# Altium PCB Controller-Board-Rev2-Small.PcbDoc
Units mm, origin at the board's own origin, x right, y up, seen from the top; angles counter-clockwise.
Board outline 25 x 25 mm, 4 copper layers (Top Layer, Internal Plane 1, Internal Plane 2, Bottom Layer), stack 0.971 mm thick; 46 components, 54 nets, 221 pads, 87 vias.
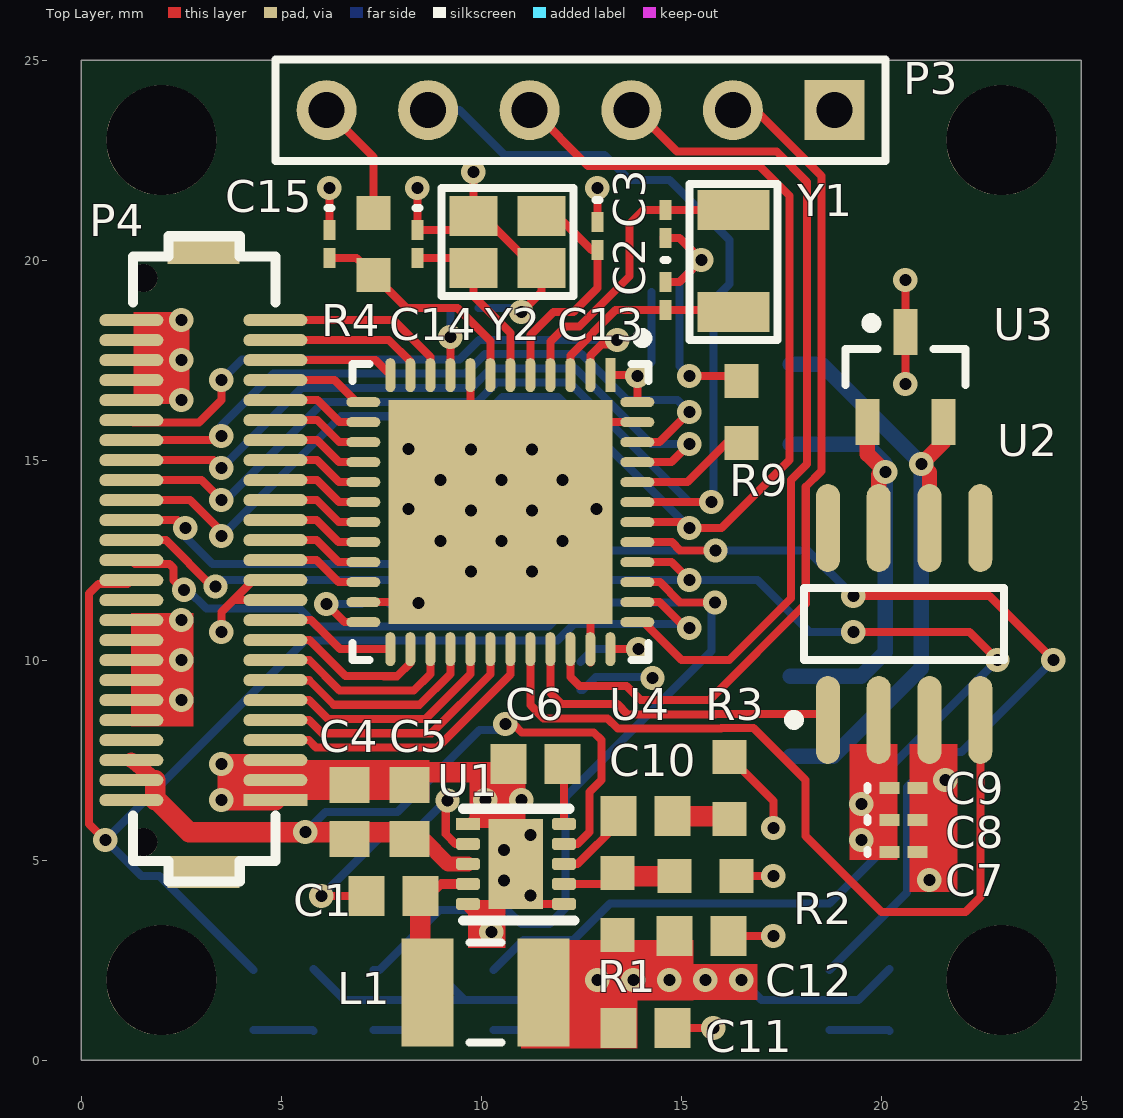
[diagram p0: Top Layer view]
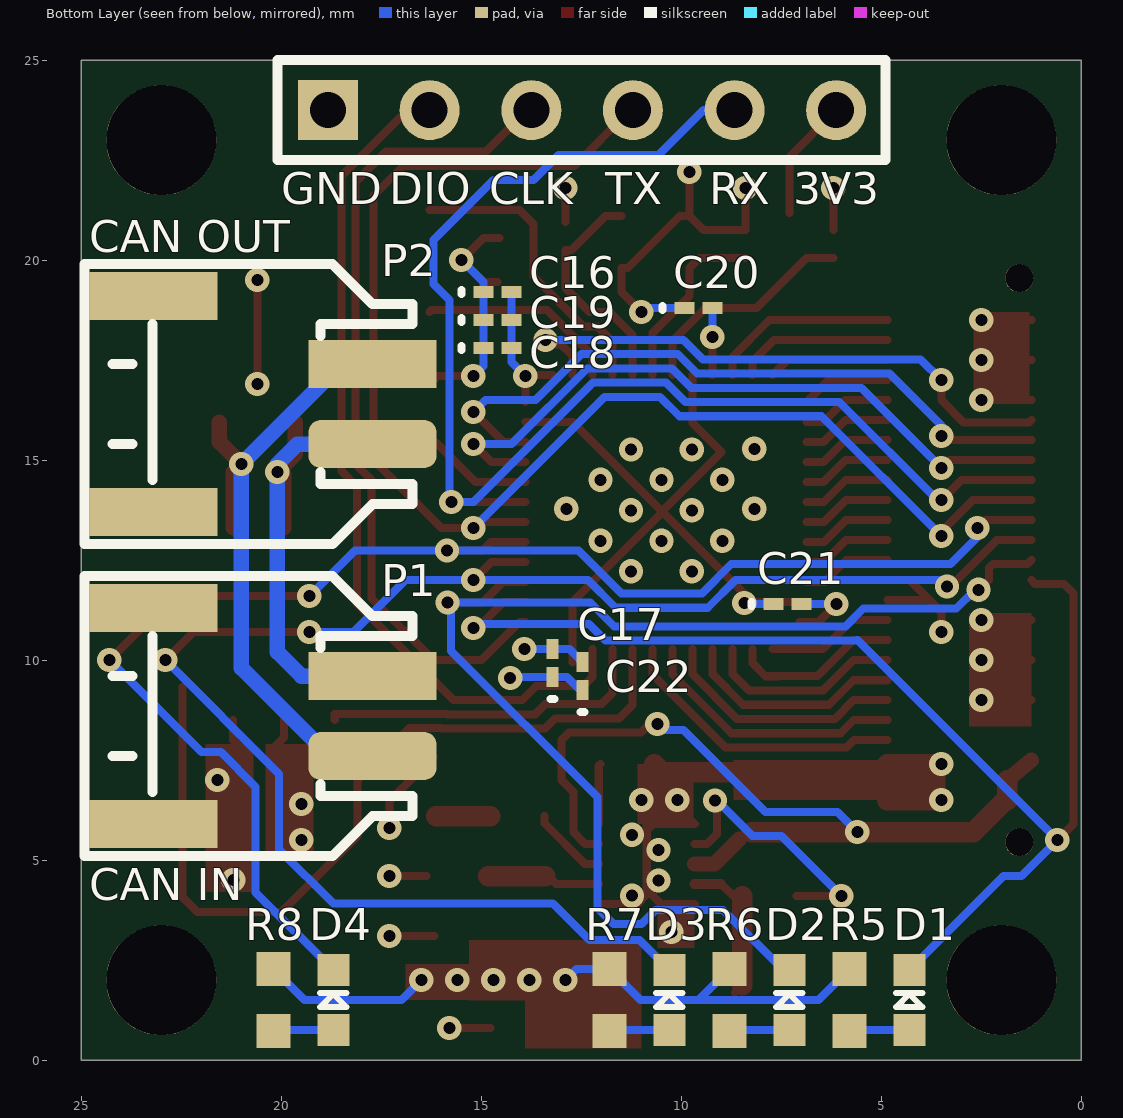
[diagram p1: Bottom Layer view, seen from below]
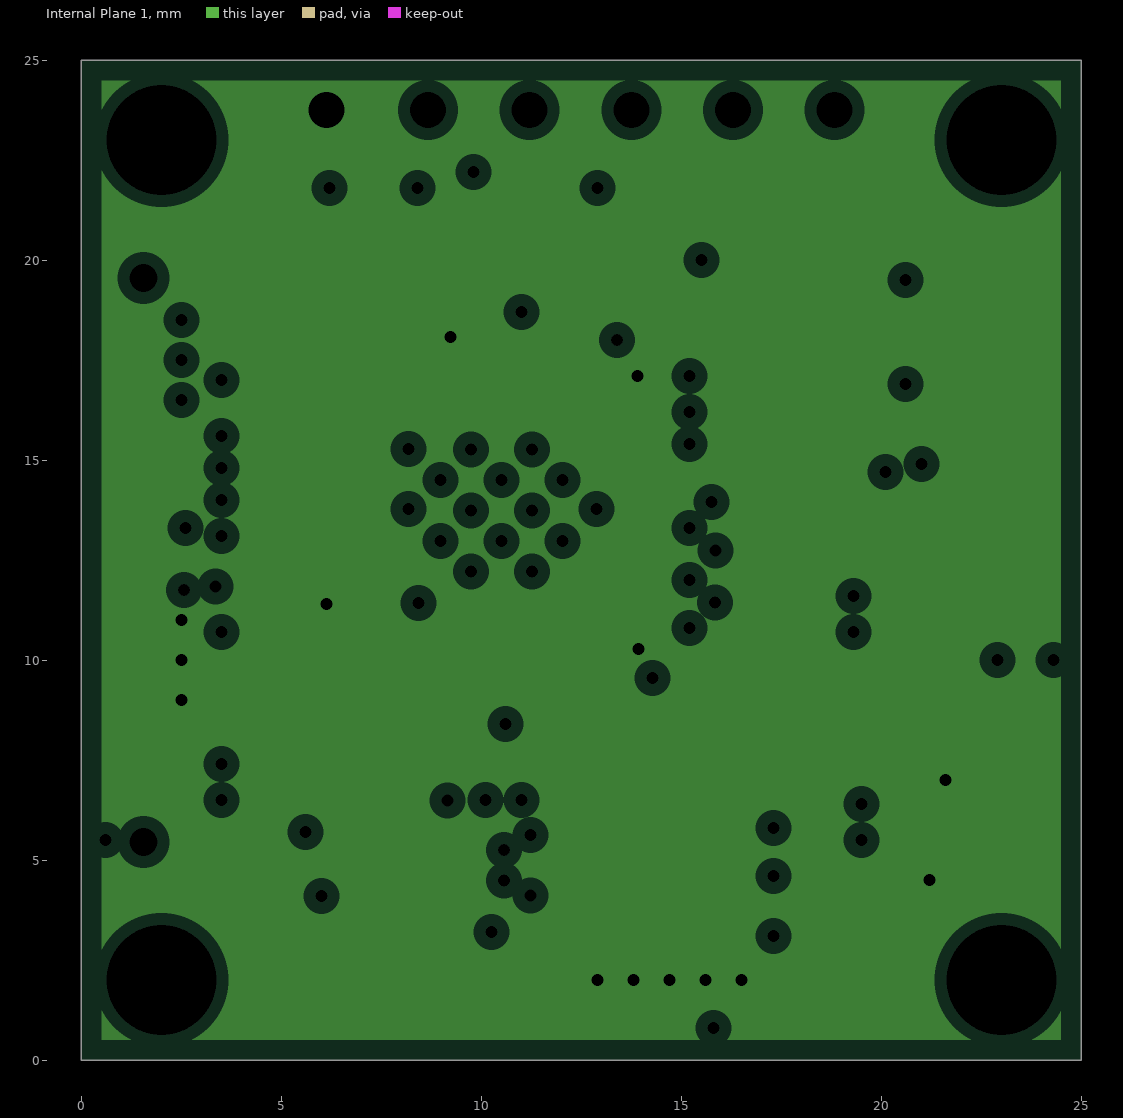
[diagram p2: Internal Plane 1, clearances drawn from the general rule]
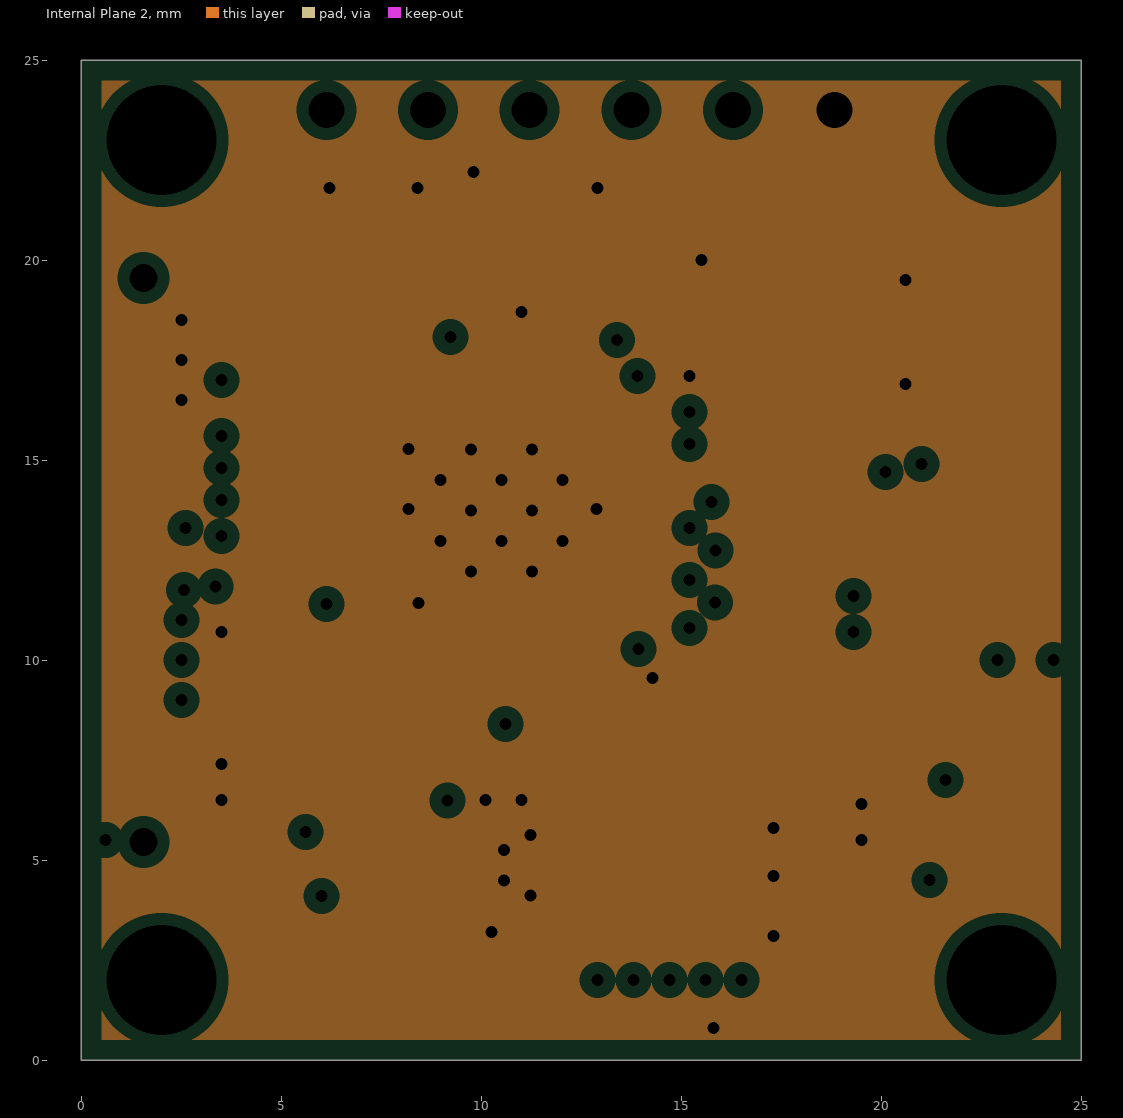
[diagram p3: Internal Plane 2, clearances drawn from the general rule]

## Layer stack, top to bottom
Top Solder: solder mask 0.0102, Solder Resist, Dk 3.5
Top Layer: signal copper 0.0356
Dielectric 3: dielectric 0.254, Dk 4.2
Internal Plane 1: plane copper 0.036, net 3V3
Dielectric 1: dielectric 0.32, FR-4, Dk 4.2
Internal Plane 2: plane copper 0.036, net GND
Dielectric 2: dielectric 0.254, Dk 4.2
Bottom Layer: signal copper 0.0356
Bottom Solder: solder mask 0.0102, Solder Resist, Dk 3.5

## Board outline
0,25 25,25 25,0 0,0

## Design rules (kind name [scope] priority, off if disabled: settings)
Clearance [All] p1: gap=0.152
DiffPairsRouting [All] p1: maxlimit=0.254 minlimit=0.254 mostfreqgap=0.254 toplayer_minwidth=0.381 toplayer_maxwidth=0.381 toplayer_prefwidth=0.381 bottomlayer_minwidth=0.381 bottomlayer_maxwidth=0.381 bottomlayer_prefwidth=0.381 maxuncoupledlength=12.7
PlaneClearance [All] p1: clearance=0.3
PlaneConnect [All] p1: planeconnectstyle=Direct reliefexpansion=0 reliefentries=4 reliefconductorwidth=0.254 reliefairgap=0.254
PolygonConnect PolygonConnect_GND_Via [IsVia vs InNet('GND')] p1: connectstyle=Direct reliefconductorwidth=0.254 reliefentries=4 polygonreliefangle="90 Angle" airgapwidth=0.254
PolygonConnect PolygonConnect_3V3_Via [IsVia vs InNet('3V3')] p2: connectstyle=Direct reliefconductorwidth=0.254 reliefentries=4 polygonreliefangle="90 Angle" airgapwidth=0.254
PolygonConnect [All] p3: connectstyle=Relief reliefconductorwidth=0.254 reliefentries=4 polygonreliefangle="90 Angle" airgapwidth=0.254
RoutingVias [All] p1: holewidth=0.3 width=0.605 viastyle="Through Hole" minholewidth=0.3 minwidth=0.605 maxholewidth=6.3 maxwidth=6.605
SolderMaskExpansion [All] p1: expansion=0.102
Width [All] p1: maxlimit=1.27 minlimit=0.152 preferedwidth=0.203
27 further rules are at their usual default settings.

## Classes and differential pairs
differential pair CAN: +CAN_P -CAN_N

## Components (designator, comment, footprint, x,y, rotation, side; value= is the part's Value field where it differs from the comment)
C1 "10nF" CAPC1608X06N 7.8,4.1 r0 top locked
C2 "8pF" 0603 14.6,19.1 r270 top
C3 "8pF" 0603 14.6,20.9 r90 top
C4 "10uF" CAPC1608X06N 6.7,6.2 r270 top locked
C5 "0.1uF" CAPC1608X06N 8.2,6.2 r270 top locked
C6 "0.1uF" CAPC1608X06N 11.35,7.4 r180 top locked
C7 "10uF" 0603 20.55,5.2 r0 top
C8 "4.7uF" 0603 20.55,6 r0 top
C9 "0.1uF" 0603 20.55,6.8 r0 top
C10 "6800pF" CAPC1608X06N 14.1,6.1 r180 top locked
C11 "22uF" CAPC1608X06N 14.1,0.8 r180 top locked
C12 "22uF" CAPC1608X06N 15.5,3.1 r180 top locked
C13 "8pF" 0603 12.9,20.6 r270 top
C14 "8pF" 0603 8.4,20.4 r270 top
C15 "0.1uF" 0603 6.2,20.4 r270 top
C16 "4.7uF" 0603 14.6,19.2 r180 bottom
C17 "4.7uF" 0603 13.225,9.925 r90 bottom
C18 "0.1uF" 0603 14.6,17.8 r180 bottom
C19 "0.1uF" 0603 14.6,18.5 r180 bottom
C20 "0.1uF" 0603 9.575,18.8 r180 bottom
C21 "0.1uF" 0603 7.35,11.4 r180 bottom
C22 "0.1uF" 0603 12.475,9.6 r90 bottom
D1 "Blue" DIOC1608X06N 4.3,1.5 r90 bottom
D2 "Blue" DIOC1608X06N 7.3,1.5 r90 bottom
D3 "Green" DIOC1608X06N 10.3,1.5 r90 bottom
D4 "Red" DIOC1608X06N 18.7,1.5 r90 bottom
L1 "10µH" 1210 10.1,1.7 r0 top locked
P1 "CAN IN" "2 POS Dura-Click" 17.72,9.6 r270 bottom locked
P2 "CAN OUT" "2 POS Dura-Click" 17.72,17.4 r270 bottom locked
P3 "Debug_Header" HDR1X6 18.83,23.75 r180 top
P4 "BergStak Receptacle" 609-5227-1-ND 3.05,12 r180 top
R1 "26.1K" RESC1608X06N 13.4,3.9 r270 top locked
R2 "10K" RESC1608X06N 15.6,4.6 r180 top locked
R3 "6.8k" RESC1608X06N 16.2,6.8 r270 top locked
R4 "100K" RESC1608X06N 7.3,20.4 r90 top
R5 "40.2R" RESC1608X06N 5.8,1.5 r90 bottom
R6 "40.2R" RESC1608X06N 8.8,1.5 r90 bottom
R7 "86.6R" RESC1608X06N 11.8,1.5 r90 bottom
R8 "86.6R" RESC1608X06N 20.2,1.5 r90 bottom
R9 "510R" RESC1608X06N 16.5,16.2 r270 top
U1 "AP65200FK-7 Buck Switching Regulator" 10-UFDFN 10.3,4 r270 top locked
U2 "TCAN332DR CAN Transceiver" SOIC8 20.6,10.9 r90 top
U3 "TVS Diode" SOT23 20.6,17.075 r90 top
U4 "STM32F072CBT6" QFN50P700X700X60_HS-49N 10.475,13.7 r270 top
Y1 "32.768 kHz" "ABS07AIG CRYSTAL" 16.3,18.7 r90 top
Y2 "32 MHz" "CX2520DB CRYSTAL" 11.5,21.1 r180 top

## Footprints (in the part's own frame and the unit in brackets; to place one, negate y for a bottom-side part, rotate by r counter-clockwise, add the part's x,y. Pads: shape width x height; smd on the part's side, far side on the other; paste and mask are expansions set on the pad)
"2 POS Dura-Click" [mm] "WM7169CT-ND"
  rect 1.2x3.2 smd: 1(0,0) ""(-1.7,-5.48) ""(3.7,-5.48)
  rrect50% 1.2x3.2 smd: 2(2,0)
  silkscreen extent -2.5,-7.2 4.5,1
10-UFDFN [mm]
  rect 0.3x0.6 smd: 1(-1.905,-0.635)
  rrect50% 0.3x0.6 smd: 2(-1.405,-0.635) 3(-0.905,-0.635) 4(-0.405,-0.635) 5(0.095,-0.635) 6(0.095,1.765) 7(-0.405,1.765) 8(-0.905,1.765) 9(-1.405,1.765) 10(-1.905,1.765)
  rect 2.25x1.36 smd paste-0.2: 11(-0.905,0.565)
  silkscreen extent -2.29,-0.76 0.51,2.03
0603 [mm] "Chip Inductor, Body 0.6x0.3mm, IPC High Density"
  rect 0.5x0.3 smd: 1(-0.35,0) 2(0.35,0)
  silkscreen extent -0.9,-0.05 -0.9,0.05, body extent -0.33,-0.18 0.33,0.18, height 0.55
609-5227-1-ND [mm]
  rect 1.6x0.3 smd: 1(-1.8,5.5)
  oval 1.6x0.3 smd: 2(-1.8,5) 3(-1.8,4.5) 4(-1.8,4) 5(-1.8,3.5) 6(-1.8,3) 7(-1.8,2.5) 8(-1.8,2) 9(-1.8,1.5) 10(-1.8,1) 11(-1.8,0.5) 12(-1.8,0) 13(-1.8,-0.5) 14(-1.8,-1) 15(-1.8,-1.5) 16(-1.8,-2) 17(-1.8,-2.5) 18(-1.8,-3) 19(-1.8,-3.5) 20(-1.8,-4) 21(-1.8,-4.5) 22(-1.8,-5) 23(-1.8,-5.5) 24(-1.8,-6) 25(-1.8,-6.5) 26(1.8,-6.5) 27(1.8,-6) 28(1.8,-5.5) 29(1.8,-5) 30(1.8,-4.5) 31(1.8,-4) 32(1.8,-3.5) 33(1.8,-3) 34(1.8,-2.5) 35(1.8,-2) 36(1.8,-1.5) 37(1.8,-1) 38(1.8,-0.5) 39(1.8,0) 40(1.8,0.5) 41(1.8,1) 42(1.8,1.5) 43(1.8,2) 44(1.8,2.5) 45(1.8,3) 46(1.8,3.5) 47(1.8,4) 48(1.8,4.5) 49(1.8,5) 50(1.8,5.5)
  rect 1.8x0.8 smd: ""(0,7.3) ""(0,-8.3)
  round 0.7 hole 0.7: ""(1.5,6.55) ""(1.5,-7.55)
  silkscreen extent -1.8,-8.6 1.76,7.53
1210 [mm]
  rect 1.3x2.7 smd: 1(-1.441,-0.01) 2(1.459,-0.01)
  silkscreen extent -0.39,-1.26 0.41,1.24, body extent -1.69,-1.36 1.71,1.34, height 1.5
"ABS07AIG CRYSTAL" [mm]
  rect 1x1.8 smd: 1(0,0) 2(2.55,0)
  silkscreen extent -0.7,-1.1 3.2,1.1
CAPC1608X06N [mm] "Chip Capacitor, 2-Leads, Body 1.60x0.81mm, IPC Medium Density"
  rect 0.9x1 smd mask+0.076: 1(-0.675,0) 2(0.675,0)
  body extent -0.87,-0.48 0.87,0.48, height 0.9
"CX2520DB CRYSTAL" [mm]
  rect 1.2x1 smd: 1(0,0) 2(1.7,0) 3(1.7,1.3) 4(0,1.3)
  silkscreen extent -0.8,-0.7 2.5,2
DIOC1608X06N [mm] "Chip Diode, 2-Leads, Body 1.60x0.80mm, IPC Medium Density"
  rect 0.8x0.8 smd: 1(-0.75,0) 2(0.75,0)
  silkscreen extent -0.18,-0.33 0.18,0.33, body extent -0.8,-0.4 0.8,0.4, height 0.55
HDR1X6 [mm] "Connector; Header; 6 Position"
  rect 1.5x1.5 hole 0.9: 1(0,0)
  round 1.5 hole 0.9: 2(2.54,0) 3(5.08,0) 4(7.62,0) 5(10.16,0) 6(12.7,0)
  silkscreen extent -1.27,-1.27 13.97,1.27
QFN50P700X700X60_HS-49N [mm] "QFN, 48-Leads, Body 7.00x7.00mm, Pitch 0.50mm, Thermal Pad 5.60x5.60mm, IPC Medium Density"
  rect 0.85x0.25 smd: 1(-3.425,2.75)
  oval 0.85x0.25 smd: 2(-3.425,2.25) 3(-3.425,1.75) 4(-3.425,1.25) 5(-3.425,0.75) 6(-3.425,0.25) 7(-3.425,-0.25) 8(-3.425,-0.75) 9(-3.425,-1.25) 10(-3.425,-1.75) 11(-3.425,-2.25) 12(-3.425,-2.75) 25(3.425,-2.75) 26(3.425,-2.25) 27(3.425,-1.75) 28(3.425,-1.25) 29(3.425,-0.75) 30(3.425,-0.25) 31(3.425,0.25) 32(3.425,0.75) 33(3.425,1.25) 34(3.425,1.75) 35(3.425,2.25) 36(3.425,2.75)
  oval 0.25x0.85 smd: 13(-2.75,-3.425) 14(-2.25,-3.425) 15(-1.75,-3.425) 16(-1.25,-3.425) 17(-0.75,-3.425) 18(-0.25,-3.425) 19(0.25,-3.425) 20(0.75,-3.425) 21(1.25,-3.425) 22(1.75,-3.425) 23(2.25,-3.425) 24(2.75,-3.425) 37(2.75,3.425) 38(2.25,3.425) 39(1.75,3.425) 40(1.25,3.425) 41(0.75,3.425) 42(0.25,3.425) 43(-0.25,3.425) 44(-0.75,3.425) 45(-1.25,3.425) 46(-1.75,3.425) 47(-2.25,3.425) 48(-2.75,3.425)
  rect 5.6x5.6 smd: ""(0,0)
  silkscreen extent -4.47,-3.7 3.7,3.7, body extent -3.6,-3.6 3.6,3.6, height 0.6
RESC1608X06N [mm] "Chip Resistor, 2-Leads, Body 1.60x0.80mm, IPC Medium Density"
  rect 0.85x0.85 smd: 1(-0.775,0) 2(0.775,0)
  body extent -0.8,-0.4 0.8,0.4, height 0.55
SOIC8 [mm]
  oval 2.2x0.6 smd: 1(-2.394,1.935) 2(-2.394,0.665) 3(-2.394,-0.605) 4(-2.394,-1.875) 5(2.406,-1.875) 6(2.406,-0.605) 7(2.406,0.665) 8(2.406,1.935)
  silkscreen extent -2.52,-2.47 0.91,2.91, body extent -1.99,-2.47 2.01,2.53, height 1.75
SOT23 [mm] "SOT23, 3-Leads, Body 2.9x1.3mm, Pitch 0.95mm, Lead Span 2.3mm - Reverse Pinning, IPC Medium Density"
  rect 1.15x0.6 smd: 1(1.125,0) 2(-1.125,-0.95) 3(-1.125,0.95)
  silkscreen extent -0.2,-1.5 1.47,1.5, body extent -0.7,-1.5 0.7,1.5, height 1.1

## Part data
C1: library part "CAP CER 10nF 50V 5% X7R 0603", "10000pF ±5% 50V Ceramic Capacitor U2J 0603 (1608 Metric)"
C2 C3 C13 C14: library part "CAP CER 20PF 100V 5% NP0 0603", "8pF ±0.5pF 50V Ceramic Capacitor C0G, NP0 0603 (1608 Metric)"
C4: library part "CAP CER 10uF 25V 20% X5R 0603", "10µF ±20% 25V Ceramic Capacitor X5R 0603 (1608 Metric)"
C5 C6 C9 C15 C18 C19 C20 C21 C22: library part "CAP CER 0.1UF 50V 10% X7R 0603", "0.10µF ±10% 50V Ceramic Capacitor X7R 0603 (1608 Metric)"
C7: library part "CAP CER 10uF 50V 10% X7R 0603", "0.10µF ±10% 50V Ceramic Capacitor X7R 0603 (1608 Metric)"
C8 C16 C17: library part "CAP CER 4.7UF 25V 10% X5R 0603", "4.7µF ±10% 25V Ceramic Capacitor X5R 0603 (1608 Metric)"
C10: library part "CAP CER 6800pF 50V 10% X7R 0603", "6800pF ±10% 50V Ceramic Capacitor X7R 0603 (1608 Metric)"
C11 C12: library part "CAP CER 22uF 25V 20% X5R 0603", "0.22µF ±20% 25V Ceramic Capacitor X5R 0603 (1608 Metric)"
D1 D2: library part LED_BLUE, "LED BLUE CLEAR 0603 SMD"
D3: library part LED_GREEN, "LED GREEN CLEAR 0603 SMD"
D4: library part LED_RED, "Red LED 0603"
L1: library part "IND 10UH POWDERED IRON 0.9A", "10µH Shielded Wirewound Inductor 900mA 420 mOhm Max 1210 (3225 Metric)"
P1 P2: library part "Header 2", "Header, 2-Pin"
P3: library part "Header 6", "Header, 6-Pin"
P4: library part "BergStak 50 Position Connector Receptacle", "50 Position Connector Receptacle, Center Strip Contacts Surface Mount Gold"
R1: library part "RES 26.1K OHM 1/10W 1% 0603 SMD", "RES SMD 26.1K OHM 1% 1/10W 0603"
R2: library part "RES SMD 10K OHM 1% 1/10W 0603", "RES SMD 10K OHM 1% 1/10W 0603"
R3: library part "RES 6.8k OHM 1% 1/10W 0603 SMD", "RES SMD 6.8K OHM 1% 1/10W 0603"
R4: library part "RES 100K OHM 1/8W 5% 0603 SMD", "RES SMD 100K OHM 5% 1/10W 0603"
R5 R6: library part "RES 40.2 OHM 0.5% 1/10W 0603 SMD", "RES SMD 40.2 OHM 0.5% 1/10W 0603"
R7 R8: library part "RES 86.6 OHM 1% 1/10W 0603 SMD", "RES SMD 86.6 OHM 1% 1/10W 0603"
R9: library part "RES 510 OHM 1/10W 0603 SMD", "RES SMD 510 OHM 5% 1/10W 0603"
U1: "Buck Switching Reg IC Positive Adjustable 0.925V 1 Output 2A 10-UFDFN Exposed Pad"
U2: "1/1 Transceiver CAN 8-SOIC"
Y1: library part "CRYSTAL 32.000 MHZ 18PF +-30ppm SMD", "32MHz ±30ppm Crystal 18pF 40 Ohm -40°C ~ 85°C Surface Mount HC49/US"
Y2: library part "CRYSTAL 32 MHz 4-SMD", "32MHz ±15ppm Crystal 8pF 50 Ohm -40°C ~ 85°C AEC-Q200 Surface Mount 4-SMD, No Lead"

## Free pads (board coordinates)
  round 2.75 hole 2.75: ""(2,2) ""(2,23) ""(23,2) ""(23,23)

## Via types
v1: diameter 0.605, hole 0.3, Top Layer to Bottom Layer, 67 vias
v2: diameter 0.605, hole 0.3, Top Layer to Bottom Layer, tented bottom, 20 vias

## Nets (pads, with @x,y where several pads share a name; then routed paths per layer and width w, separated by ;. In a path a pad name is that pad's centre, name@x,y a point inside that pad or via, vN(x,y) a via of type N, cw(c..) or ccw(c..) an arc to the next point about the centre after c; other vN are vias at no path point)
3V3: C7.2 C8.2 C9.2 C11.2 C12.2 C16.2 C17.2 C18.2 C19.2 C20.2 C21.2 C22.2 L1.2 P3.6 P4.41 P4.42 P4.43 P4.44 P4.45 P4.46 R1.2 R4.2 R5.2 R6.2 R7.2 R8.2 U2.3 U4.1 U4.9 U4.24 U4.36 U4.48 | length 39.6
  Top Layer w0.203: P4.45 v1(2.5,9) ; P4.43 v1(2.5,10) ; P4.41 v1(2.5,11) ; v1(6.125,11.4) 6.575,10.95 U4.24 ; P3.6 7.3,22.58 R4.2 ; U4.9 v1(9.225,18.075) ; L1.2 12.59,1.69 v1(12.9,2) v1(13.8,2) v1(14.7,2) v1(15.6,2) v1(16.5,2) ; U4.36 v1(13.925,10.275) ; U4.1 13.875,17.125 v1(13.9,17.1) U4.48 ; v1(21.2,4.5) 21.2,4.9 C7.2 C8.2 C9.2 ; U2.3 21.205,8.005 20.9,7.7 C9.2 ; v1(21.6,7) 21.4,6.8 C9.2
  Bottom Layer w0.203: R5.2 6.575,1.5 9.575,1.5 ; v1(6.125,11.4) C21.2 ; R6.2 9.575,1.5 ; v1(9.225,18.075) C20.2 ; C22.2 12.8,10.275 C17.2 v1(13.925,10.275) ; v1(12.9,2) 12.625,2.275 R7.2 11.025,1.5 9.575,1.5 ; v1(13.9,17.1) 14.25,17.45 C18.2 C19.2 C16.2 ; v1(16.5,2) 17,1.5 19.425,1.5 R8.2
12V_IN: C4.2 C5.2 P4.48 P4.49 P4.50 U1.3 U1.9 | length 21.6
  Top Layer w0.203: P4.50@1.85,6.5 P4.50@1.9,6.5 ; C5.2@8.244,5.7 C5.2@8.55,5.525 ; v1(10.6,8.4) 10.8,8.4 11.011,8.189 12.811,8.189 13,8 13,7 12.7,6.7 12.7,5.7 12.405,5.405 U1.9
  Top Layer w0.381: P4.48 P4.49@1.85,7 ; C5.2@8.55,5.525 9.17,4.905 U1.3
  Top Layer w0.508: P4.50@1.85,6.5 P4.49@1.85,7 ; P4.50@1.9,6.5 2.7,5.7 v1(5.6,5.7) C5.2@8.244,5.7
  Bottom Layer w0.203: v1(5.6,5.7) 6.1,6.2 7.9,6.2 9.95,8.25 10.45,8.25 v1(10.6,8.4)
BOOT0: R9.2 U4.44 | length 3
  Top Layer w0.203: U4.44 15.15,14.45 16.125,15.425 R9.2
BST: C1.1 U1.2 | length 6.8
  Top Layer w0.203: v1(6,4.1) C1.1 ; v1(9.155,6.488) 9.111,6.444 9.111,5.65 9.356,5.405 U1.2
  Bottom Layer w0.203: v1(6,4.1) 7.5,5.6 8.224,5.6 9.112,6.488 v1(9.155,6.488)
CAN_N: P1.2 P2.1 U2.6 U3.2 | length 16.6
  Top Layer w0.381: U2.6 21.205,14.695 v1(21,14.9) 21.55,15.45 U3.2
  Bottom Layer w0.381: P1.2 18.8,7.6 21,9.8 v1(21,14.9) 18.5,17.4 P2.1
CAN_P: P1.1 P2.2 U2.7 U3.3 | length 12.8
  Top Layer w0.381: U3.3 19.65,15.15 v1@20.05,14.75 ; U2.7 19.935,14.635 v1@20.05,14.75 ; v1(20.1,14.7) v1@20.05,14.75
  Bottom Layer w0.381: P1.1 19.5,9.6 20.1,10.2 v1(20.1,14.7) 20.1,14.9 19.6,15.4 P2.2
COMP: C10.2 U1.8 | length 2
  Top Layer w0.203: U1.8 12.408,4.905 13.425,5.922 C10.2
FB: R1.1 R2.2 U1.7 | length 2.9
  Top Layer w0.203: U1.7 13.13,4.405 R1.1 R1.1@13.4,4.6
  Top Layer w0.508: R1.1@13.4,4.6 R2.2
GND: C2.1 C3.1 C4.1 C5.1 C6.2 C7.1 C8.1 C9.1 C11.1 C12.1 C13.1 C14.1 C15.1 C16.1 C17.1 C18.1 C19.1 C20.1 C21.1 C22.1 P3.1 P4.1 P4.2 P4.3 P4.11 P4.12 P4.26 P4.27 P4.28 P4.29 P4.30 R2.1 R3.1 R9.1 U1.1 U1.5 U1.6 U1.11 U2.2 U3.1 U4. U4.8 U4.23 U4.35 U4.47 Y2.2 Y2.4 | length 71.7
  Top Layer w0.203: P4.30 v1(2.5,16.5) ; P4.28 v1(2.5,17.5) ; P4.26 v1(2.5,18.5) ; v1@3.5,10.6 v1(3.5,10.7) 3.5,11.2 3.8,11.5 ; P4.11 3.8,11.5 ; P4.12 4.3,12 3.8,11.5 ; C15.1 v1(6.2,21.8) ; U4.23 8.225,11.45 U4. ; C5.1 C5.1@8.525,7.2 ; v1(8.4,21.8) C14.1 9.45,20.75 Y2.2 ; U4.8 9.725,15.925 9,15.2 10.475,13.725 U4. ; v1(9.8,22.2) Y2.2 ; v1(10.1,6.5) 10.1,6.34 U1.1 10.695,5.905 U1.11@10.865,5.735 ; v1(10.25,3.2) 9.665,3.785 U1.5 10.505,3.905 U1.11@10.865,4.265 ; v1(11,6.5) 10.865,6.365 U1.11@10.865,5.735 ; v1(11,18.7) 11.5,19.2 Y2.4 11.341,19.8 10.041,21.1 Y2.2 ; U1.6 11.095,3.905 10.865,4.135 U1.11@10.865,4.265 ; U4.35@12.725,9.939 U4.35 12.725,11.45 U4. ; C13.1 v1(12.9,21.8) ; U4.47 12.725,15.95 U4. ; v1@14.275,9.55 14.277,9.552 v1(14.277,9.556) ; C3.1@14.55,20.55 C3.1 14.95,20.55 v1(15.5,20) 14.95,19.45 C2.1 ; C11.1 v1(15.8,0.8) ; v1(15.2,17.1) 16.1,17.1 16.225,16.975 R9.1 R9.1@16.3,17.175 ; C12.1 v1(17.3,3.1) ; R3.1 17.3,6.475 v1(17.3,5.8) ; R2.1 v1(17.3,4.6) ; v1(19.5,5.5) 19.8,5.2 C7.1 C8.1 C9.1 ; v1(19.5,6.4) 19.9,6.8 C9.1 ; U2.2 19.935,8.065 20.2,7.8 C9.1 ; v1(20.6,16.9) U3.1 v1(20.6,19.5) ; U1.11@10.865,4.265 U1.11 U1.11@10.865,5.735
  Top Layer w0.508: v1(3.5,6.5) P4.1 ; v1(3.5,7.4) P4.3@4.85,7.4 ; C5.1@8.525,7.2 10.475,7.2 C6.2
  Bottom Layer w0.203: v1(3.5,7.4) v1@3.5,7.5 ; C21.1 8.4,11.4 v2(8.425,11.425) ; C20.1 10.9,18.8 v1(11,18.7) ; v1@10.1,3.2 v1(10.25,3.2) ; C22.1 12.534,9.25 12.859,9.575 C17.1 14.259,9.575 v1(14.277,9.556) ; v1(15.2,17.1) 14.95,17.35 C18.1 C19.1 C16.1 14.95,19.45 v1(15.5,20)
  other v2: 11.231,4.11 10.57,4.491 10.57,5.253 11.231,5.634 9.737,12.221 11.261,12.221 8.975,12.983 10.499,12.983 12.023,12.983 9.737,13.745 11.261,13.745 8.175,13.783 12.875,13.783 8.975,14.507 10.499,14.507 12.023,14.507 8.175,15.283 9.737,15.269 11.261,15.269
NetC10_1: C10.1 R3.2 | length 1.5
  Top Layer w0.203: R3.2@16.125,6.1 R3.2
  Top Layer w0.508: C10.1 R3.2@16.125,6.1
NetD1_1: D1.1 R5.1 | length 1.5
  Bottom Layer w0.203: D1.1 5.775,0.75 R5.1
NetD2_1: D2.1 R6.1 | length 1.5
  Bottom Layer w0.203: D2.1 8.775,0.75 R6.1
NetD3_1: D3.1 R7.1 | length 1.5
  Bottom Layer w0.203: D3.1 11.775,0.75 R7.1
NetD4_1: D4.1 R8.1 | length 1.5
  Bottom Layer w0.203: D4.1 20.175,0.75 R8.1
NRST: C15.2 R4.1 U4.7 | length 5.7
  Top Layer w0.203: C15.2 6.875,20.05 R4.1 8.125,18.8 9.4,18.8 10.225,17.975 U4.7
PA0: P4.25 U4.10 | length 4.7
  Top Layer w0.203: P4.25 7.803,18.5 8.725,17.578 U4.10
PA1: P4.24 U4.11 | length 3.9
  Top Layer w0.203: P4.24 7.686,18 8.225,17.461 U4.11
PA2/USART2_TX: P4.23 U4.12 | length 3
  Top Layer w0.203: P4.23 7.35,17.5 U4.12
PA3/USART2_RX: P4.22 U4.13 | length 2.3
  Top Layer w0.203: P4.22 6.325,17 U4.13@6.875,16.45
PA4/SPI1_NSS: P4.21 U4.14 | length 2.3
  Top Layer w0.203: P4.21 5.9,16.5 6.45,15.95 U4.14@6.875,15.95
PA5/SPI1_SCK: P4.20 U4.15 | length 2.3
  Top Layer w0.203: P4.20 5.897,16 6.447,15.45 U4.15@6.875,15.45
PA6/SPI1_MISO: P4.19 U4.16 | length 2.3
  Top Layer w0.203: P4.19 5.894,15.5 6.444,14.95 U4.16@6.875,14.95
PA7/SPI1_MOSI: P4.18 U4.17 | length 2.3
  Top Layer w0.203: P4.18 5.891,15 6.441,14.45 U4.17@6.875,14.45
PA8: P4.6 U4.29 | length 6.2
  Top Layer w0.203: P4.6 5.691,9 6.162,8.529 8.605,8.529 9.725,9.649 U4.29
PA9: P4.5 U4.30 | length 6.7
  Top Layer w0.203: P4.5 5.688,8.5 6.015,8.174 8.753,8.174 10.225,9.646 U4.30
PA10: P4.4 U4.31 | length 7.3
  Top Layer w0.203: P4.4 5.686,8 5.868,7.818 8.9,7.818 10.725,9.643 U4.31
PA11/CAN_RX: U2.4 U4.32 | length 21
  Top Layer w0.203: U4.32 11.225,8.875 11.556,8.544 13.156,8.544 13.411,8.289 15.995,8.289 16.006,8.3 16.8,8.3 18.1,7 18.1,5.6 20,3.7 22.1,3.7 22.475,4.075 U2.4 U2.4@22.475,9.325
PA12/CAN_TX: U2.1 U4.33 | length 8.4
  Top Layer w0.203: U4.33 11.725,9.175 12,8.9 13.4,8.9 13.656,8.644 15.847,8.644 15.858,8.656 18.665,8.656 U2.1
PA13/SWDIO: P3.2 U4.34 | length 21.6
  Top Layer w0.203: U4.34 12.225,9.575 12.45,9.35 13.628,9.35 13.978,9 15.7,9 18.111,11.411 18.111,14.335 18.5,14.724 18.5,22.1 16.85,23.75 P3.2
PA14/SWCLK: P3.3 U4.37 | length 20.6
  Top Layer w0.203: P3.3 13.85,23.75 14.888,22.712 17.385,22.712 18.144,21.953 18.144,14.9 17.744,14.5 17.744,11.547 16.197,10 15,10 14.05,10.95 U4.37
PA15: D1.2 P4.39 U4.38 | length 31
  Top Layer w0.203: v1(0.6,5.5) 0.196,5.904 0.196,11.667 0.433,11.904 1.154,11.904 P4.39 ; U4.38 14.45,11.45 15.1,10.8 v1(15.2,10.8)
  Bottom Layer w0.203: D1.2 1.95,4.6 1.5,4.6 v1(0.6,5.5) 5.6,10.5 5.612,10.488 11.9,10.488 12.312,10.9 15.1,10.9 v1(15.2,10.8)
PB0: P4.17 U4.18 | length 2.3
  Top Layer w0.203: P4.17 5.888,14.5 6.438,13.95 U4.18@6.875,13.95
PB1: P4.16 U4.19 | length 2.3
  Top Layer w0.203: P4.16 5.886,14 6.436,13.45 U4.19@6.875,13.45
PB2: P4.15 U4.20 | length 2.3
  Top Layer w0.203: P4.15 5.883,13.5 6.433,12.95 U4.20@6.875,12.95
PB3: D2.2 P4.38 U4.39 | length 32.8
  Top Layer w0.203: P4.38 1.346,12.404 2.206,12.404 2.304,12.306 2.304,11.996 2.569,11.731 v1(2.569,11.757) ; U4.39 14.463,11.95 14.97,11.444 v1(15.844,11.444)
  Bottom Layer w0.203: v1(2.569,11.757) 2.656,11.757 3.126,11.287 5.451,11.287 5.895,10.844 11.676,10.844 12.276,11.444 v1(15.844,11.444) 15.756,11.356 15.756,10.231 12.1,6.575 12.1,3.8 11.7,3.4 11,3.4 10.644,3.756 8.956,3.756 7.45,2.25 D2.2
PB4: D3.2 P4.37 U4.40 | length 42
  Top Layer w0.203: P4.37 2.113,13 3.269,11.844 v1(3.357,11.844) ; U4.40 14.75,12.45 v1(15.2,12) ; v1(19.3,10.7) 22.2,10.7 v1(22.9,10)
  Bottom Layer w0.203: v1(3.357,11.844) 3.513,12 8.65,12 9.341,11.309 11.639,11.309 12.33,12 v1(15.2,12) 16.9,12 18.2,10.7 v1(19.3,10.7) ; D3.2 11.05,3 12.3,3 13.213,3.913 18.7,3.913 20.056,5.27 20.056,7.156 v1(22.9,10)
PB5: D4.2 P4.36 U4.41 | length 37.9
  Top Layer w0.203: P4.36 2.4,13.5 v1(2.6,13.3) ; U4.41 14.763,12.95 14.97,12.744 v1(15.856,12.744) ; v1(19.3,11.6) 22.7,11.6 v1(24.3,10)
  Bottom Layer w0.203: v1(2.6,13.3) 2.6,13.075 3.275,12.4 8.753,12.4 9.488,11.665 11.492,11.665 12.57,12.744 v1(15.856,12.744) 18.156,12.744 v1(19.3,11.6) ; D4.2 20.644,4.194 20.644,6.83 21.513,7.7 22,7.7 v1(24.3,10)
PB6/USART1_TX: P3.4 P4.35 U4.42 | length 35.8
  Top Layer w0.203: P4.35 2.713,14 3.5,13.213 v1(3.5,13.1) ; P3.4 11.276,23.75 12.67,22.356 16.953,22.356 17.7,21.609 17.7,15 16,13.3 v1(15.2,13.3) 15.05,13.45 U4.42
  Bottom Layer w0.203: v1(3.5,13.1) 6.496,16.096 10.045,16.096 10.531,16.582 11.918,16.582 v1(15.2,13.3) v1@15.2,13.4
PB7/USART1_RX: P3.5 P4.34 U4.43 | length 34.6
  Top Layer w0.203: P4.34 3,14.5 v1(3.5,14) ; U4.43 v1(15.75,13.95)
  Bottom Layer w0.203: v1(3.5,14) 3.6,14 6.052,16.452 9.897,16.452 10.384,16.938 12.205,16.938 15.193,13.95 v1(15.75,13.95) 15.8,14 15.8,19 16.2,19.4 16.2,20.5 14.7,22 13.7,22 13.075,22.625 10.575,22.625 9.45,23.75 P3.5
PB8/I2C1_SCL: P4.33 U4.45 | length 17.3
  Top Layer w0.203: P4.33 3.3,15 v1(3.5,14.8) ; U4.45 14.75,14.95 v1(15.2,15.4)
  Bottom Layer w0.203: v1(3.5,14.8) 3.5,14.807 5.5,16.807 9.75,16.807 10.236,17.294 12.353,17.294 14.246,15.4 v1(15.2,15.4)
PB9/I2C1_SDA: P4.32 U4.46 | length 17.2
  Top Layer w0.203: P4.32 3.4,15.5 v1(3.5,15.6) ; U4.46 14.45,15.45 v1(15.2,16.2)
  Bottom Layer w0.203: v1(3.5,15.6) 3.5,15.863 4.8,17.163 9.603,17.163 10.089,17.649 12.5,17.649 13.649,16.5 14.9,16.5 v1(15.2,16.2)
PB10/USART3_TX/I2C2_SCL: P4.14 U4.21 | length 2.3
  Top Layer w0.203: P4.14 5.88,13 6.43,12.45 U4.21@6.875,12.45
PB11/USART3_RX/I2C2_SDA: P4.13 U4.22 | length 2.3
  Top Layer w0.203: P4.13 5.877,12.5 6.427,11.95 U4.22@6.875,11.95
PB12/SPI2_NSS: P4.10 U4.25 | length 3.2
  Top Layer w0.203: P4.10 5.738,11 6.463,10.275 U4.25
PB13/SPI2_SCK: P4.9 U4.26 | length 4.2
  Top Layer w0.203: P4.9 5.7,10.5 6.6,9.6 7.564,9.6 7.568,9.596 7.896,9.596 8.225,9.925 U4.26
PB14/SPI2_MISO: P4.8 U4.27 | length 5
  Top Layer w0.203: P4.8 5.697,10 6.457,9.24 8.311,9.24 8.725,9.655 U4.27
PB15/SPI2_MOSI: P4.7 U4.28 | length 5.6
  Top Layer w0.203: P4.7 4.853,9.497 5.697,9.497 6.309,8.885 8.458,8.885 9.225,9.652 U4.28
PC13: P4.31 U4.2 | length 14.6
  Top Layer w0.203: P4.31 1.306,15.944 2.944,15.944 3.5,16.5 v1(3.5,17) ; U4.2 12.725,17.616 13.004,17.896 13.288,17.896 v1(13.397,18.005)
  Bottom Layer w0.203: v1(3.5,17) 4.019,17.519 9.455,17.519 9.942,18.005 v1(13.397,18.005)
PC14/OSC32_IN: C2.2 U4.3 Y1.1 | length 5.1
  Top Layer w0.203: U4.3 12.225,17.619 13.356,18.75 C2.2 16.25,18.75 Y1.1
PC15/OSC32_OUT: C3.2 U4.4 Y1.2 | length 7.5
  Top Layer w0.203: U4.4 11.725,17.969 12.1,18.344 12.447,18.344 13.7,19.597 13.7,20.9 14.05,21.25 C3.2 Y1.2
PF0/OSC_IN: C13.2 U4.5 Y2.1 | length 5.9
  Top Layer w0.203: U4.5 11.225,18.125 11.8,18.7 12.3,18.7 12.9,19.3 C13.2 12.75,20.25 11.9,21.1 Y2.1
PF1/OSC_OUT: C14.2 U4.6 Y2.3 | length 4.6
  Top Layer w0.203: C14.2 9.55,20.05 Y2.3 9.8,19.1 10.725,18.175 U4.6
SS: C6.1 U1.10 | length 1.5
  Top Layer w0.203: C6.1 12.065,7.36 U1.10
SW: C1.2 L1.1 U1.4 | length 3.8
  Top Layer w0.203: L1.1@8.475,1.874 L1.1 ; C1.2 8.7,4.1 9.005,4.405
  Top Layer w0.254: 9.005,4.405 U1.4
  Top Layer w0.508: L1.1@8.475,1.874 C1.2
pads on no net: P1. P2. P4. P4.40 P4.47 U2.5 U2.8

## Polygon pours and split planes (outlines as drawn)
GND on Internal Plane 2 (split plane): 24.49,0.51 0.51,0.51 0.51,24.49 24.49,24.49
3V3 on Internal Plane 1 (split plane): 24.49,0.51 0.51,0.51 0.51,24.49 24.49,24.49

## Other copper
Top Layer:
  rectangle net 3V3: 20.7,4.2 21.9,7.9
  rectangle net GND: 19.2,5 20.4,7.9
  rectangle net GND: 1.3,16.4 2.7,18.7
  rectangle net 3V3: 15.2,1.5 16.9,2.4
  rectangle net GND: 9.665,2.8 10.6,3.905
  rectangle net GND: 9.7,5.9 11.1,7.4
  rectangle net GND: 3.4,6.5 8.7,7.5
  region net 3V3: 11,3 15.3,3 15.3,1.5 13.9,1.5 13.9,0.3 11,0.3
  region net 3V3: 1.25,11.175 2.8,11.175 2.8,8.35 1.25,8.35

## Silkscreen, mask and mechanical layers (free items; w line width, h text height)
Bottom Overlay:
  lines w0.254: 4.9,22.5 4.9,25 20.1,25 20.1,22.5 4.9,22.5
  text "3V3" at 7.2,21.4 h0.8
  text "RX" at 9.3,21.4 h0.8
  text "TX" at 11.9,21.4 h0.8
  text "CLK" at 14.8,21.4 h0.8
  text "DIO" at 17.3,21.4 h0.8
  text "GND" at 20,21.4 h0.8
  text "CAN OUT" at 24.8,20.2 h0.8
  text "CAN IN" at 24.8,4 h0.8